# Altium PCB M2 Breakout.PcbDoc
Units mil, origin at the board's own origin, x right, y up, seen from the top; angles counter-clockwise.
Board outline 867.01 x 296.54 mil, 2 copper layers (Top Layer, Bottom Layer), stack 19.4 mil thick; 2 components, 49 nets, 130 pads, 33 vias.
Unrouted connection lines stored in the file: 1.
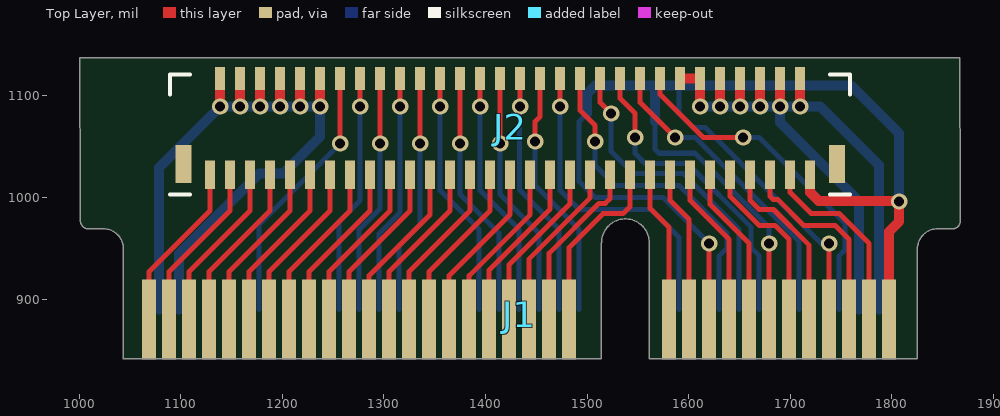
[diagram p0: Top Layer view]
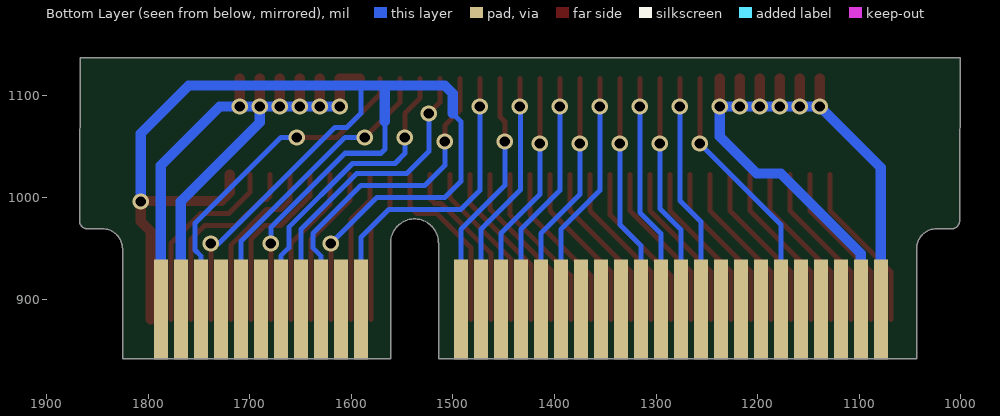
[diagram p1: Bottom Layer view, seen from below]

## Layer stack, top to bottom
Top Solder: solder mask 0.4, Solder Resist, Dk 3.5
Top Layer: signal copper 1.4
Dielectric 1: dielectric 16.6, FR-4, Dk 4.8
Bottom Layer: signal copper 1.4
Bottom Solder: solder mask 0.4, Solder Resist, Dk 3.5

## Board outline
1043.58,841.26 1043.58,949.53 ccw(c1023.9,949.53) 1023.9,969.21 1009.13,969.21 cw(c1009.13,977.09) 1001.26,977.09 1001.26,998.74 1000.39,1137.8 1866.53,1137.8 1867.4,998.74 1867.4,977.09 cw(c1859.53,977.09) 1859.53,969.21 1844.76,969.21 ccw(c1844.76,949.53) 1825.08,949.53 1825.08,841.26 1561.3,841.26 1561.3,955.43 1561.19,955.43 ccw(c1537.68,955.43) 1514.17,955.43 1514.06,955.43 1514.06,841.26

## Design rules (kind name [scope] priority, off if disabled: settings)
Clearance [All] p1: gap=5 ignorepadtopadclearanceinfootprint=FALSE except(0: Arc-Hole Track-Hole SMDPad-Hole THPad-Hole Via-Hole Fill-Hole Poly-Hole Region-Hole Text-Hole)
PolygonConnect [All] p1: connectstyle=Relief reliefconductorwidth=10 reliefentries=4 polygonreliefangle="90 Angle" airgapwidth=10
RoomDefinition "M2 Breakout" [InComponentClass('M2 Breakout')] p1: confinementstyle=ConfineIn formatcopy=TRUE lockcomponents=FALSE outline 0,0 7630,0 7630,5450 0,5450
RoutingVias [All] p1: holewidth=10 width=16 viastyle="Through Hole" minholewidth=8 minwidth=12 maxholewidth=16 maxwidth=20
SolderMaskExpansion [All] p1: expansion=4
Width [All] p1: maxlimit=10 minlimit=5 preferedwidth=6 minimp=50.000000 maximp=50.000000 favimp=50.000000
30 further rules are at their usual default settings.

## Components (designator, comment, footprint, x,y, rotation, side; value= is the part's Value field where it differs from the comment)
J1 "M.2 E-Key Shorty" "M.2 E-Key Shorty" 1433.07,840.55 r0 top
J2 "5020786162" 5020786162 1424.21,1022.44 r0 top

## Footprints (in the part's own frame and the unit in brackets; to place one, negate y for a bottom-side part, rotate by r counter-clockwise, add the part's x,y. Pads: shape width x height; smd on the part's side, far side on the other; paste and mask are expansions set on the pad)
5020786162 [mm] "Conn FPC Connector SKT 61 POS 0.25mm Solder RA SMD T/R"
  rect 0.25x0.72 smd: 1(7.5,0) 3(7,0) 5(6.5,0) 7(6,0) 9(5.5,0) 11(5,0) 13(4.5,0) 15(4,0) 17(3.5,0) 19(3,0) 21(2.5,0) 23(2,0) 25(1.5,0) 27(1,0) 29(0.5,0) 31(0,0) 33(-0.5,0) 35(-1,0) 37(-1.5,0) 39(-2,0) 41(-2.5,0) 43(-3,0) 45(-3.5,0) 47(-4,0) 49(-4.5,0) 51(-5,0) 53(-5.5,0) 55(-6,0) 57(-6.5,0) 59(-7,0) 61(-7.5,0)
  rect 0.25x0.57 smd: 2(7.25,2.405) 4(6.75,2.405) 6(6.25,2.405) 8(5.75,2.405) 10(5.25,2.405) 12(4.75,2.405) 14(4.25,2.405) 16(3.75,2.405) 18(3.25,2.405) 20(2.75,2.405) 22(2.25,2.405) 24(1.75,2.405) 26(1.25,2.405) 28(0.75,2.405) 30(0.25,2.405) 32(-0.25,2.405) 34(-0.75,2.405) 36(-1.25,2.405) 38(-1.75,2.405) 40(-2.25,2.405) 42(-2.75,2.405) 44(-3.25,2.405) 46(-3.75,2.405) 48(-4.25,2.405) 50(-4.75,2.405) 52(-5.25,2.405) 54(-5.75,2.405) 56(-6.25,2.405) 58(-6.75,2.405) 60(-7.25,2.405)
  rect 0.4x0.95 smd: 62(8.17,0.265) 63(-8.17,0.265)
  silkscreen extent -8.5,-0.5 8.5,2.5, body extent -8.5,-0.45 8.5,2.53, height 0.99
"M.2 E-Key Shorty" [mm]
  rect 0.35x2 smd paste-0.175: 1(9.25,1) 3(8.75,1) 5(8.25,1) 7(7.75,1) 9(7.25,1) 11(6.75,1) 13(6.25,1) 15(5.75,1) 17(5.25,1) 19(4.75,1) 21(4.25,1) 23(3.75,1) 33(1.25,1) 35(0.75,1) 37(0.25,1) 39(-0.25,1) 41(-0.75,1) 43(-1.25,1) 45(-1.75,1) 47(-2.25,1) 49(-2.75,1) 51(-3.25,1) 53(-3.75,1) 55(-4.25,1) 57(-4.75,1) 59(-5.25,1) 61(-5.75,1) 63(-6.25,1) 65(-6.75,1) 67(-7.25,1) 69(-7.75,1) 71(-8.25,1) 73(-8.75,1) 75(-9.25,1)
  rect 0.35x2.5 smd far side paste-0.175: 2(9,1.25) 4(8.5,1.25) 6(8,1.25) 8(7.5,1.25) 10(7,1.25) 12(6.5,1.25) 14(6,1.25) 16(5.5,1.25) 18(5,1.25) 20(4.5,1.25) 22(4,1.25) 32(1.5,1.25) 34(1,1.25) 36(0.5,1.25) 38(0,1.25) 40(-0.5,1.25) 42(-1,1.25) 44(-1.5,1.25) 46(-2,1.25) 48(-2.5,1.25) 50(-3,1.25) 52(-3.5,1.25) 54(-4,1.25) 56(-4.5,1.25) 58(-5,1.25) 60(-5.5,1.25) 62(-6,1.25) 64(-6.5,1.25) 66(-7,1.25) 68(-7.5,1.25) 70(-8,1.25) 72(-8.5,1.25) 74(-9,1.25)

## Part data
J2: "Conn FPC Connector SKT 61 POS 0.25mm Solder RA SMD T/R"

## Via types
v1: diameter 16, hole 10, Top Layer to Bottom Layer, 33 vias

## Nets (pads, with @x,y where several pads share a name; then routed paths per layer and width w, separated by ;. In a path a pad name is that pad's centre, name@x,y a point inside that pad or via, vN(x,y) a via of type N, cw(c..) or ccw(c..) an arc to the next point about the centre after c; other vN are vias at no path point)
3V3: J1.2 J1.4 J1.72 J1.74 J2.2 J2.4 J2.6 J2.8 J2.10 J2.12 J2.14 J2.50 J2.52 J2.54 J2.56 J2.58 J2.60 | length 1518.6
  Top Layer w10: v1(1138.78,1089.57) J2.60 ; v1(1158.46,1089.57) J2.58 ; v1(1178.15,1089.57) J2.56 ; v1(1197.83,1089.57) J2.54 ; v1(1217.52,1089.57) J2.52 ; v1(1237.2,1089.57) J2.50 ; J2.14 J2.12 v1(1611.22,1089.57) ; v1(1630.91,1089.57) J2.10 ; v1(1650.59,1089.57) J2.8 ; v1(1670.28,1089.57) J2.6 ; v1(1689.96,1089.57) J2.4 ; v1(1709.65,1089.57) J2.2
  Bottom Layer w10: J1.74 1078.74,1029.53 v1(1138.78,1089.57) v1(1158.46,1089.57) v1(1178.15,1089.57) v1(1197.83,1089.57) v1(1217.52,1089.57) v1(1237.2,1089.57) 1237.2,1060.04 1200.79,1023.62 1177.17,1023.62 1098.43,944.88 J1.72 ; v1(1611.22,1089.57) v1(1630.91,1089.57) v1(1650.59,1089.57) v1(1670.28,1089.57) v1(1689.96,1089.57) ; J1.4 1767.72,996.06 1689.96,1073.82 v1(1689.96,1089.57) ; J1.2 1787.4,1031.5 1729.33,1089.57 v1(1709.65,1089.57) v1(1689.96,1089.57)
6: J1.6 J2.16 | length 337.3
  Top Layer w5: J2.16 1571.85,1101.38 1614.17,1059.06 v1(1653.54,1059.06)
  Bottom Layer w5: v1(1653.54,1059.06) 1669.29,1059.06 1753.69,974.66 1753.69,948.3 1748.03,942.65 J1.6
10: J1.10 J2.18 | length 303.7
  Top Layer w5: J2.18 1552.17,1093.5 v1(1586.61,1059.06)
  Bottom Layer w5: v1(1586.61,1059.06) 1606.3,1059.06 1708.66,956.69 J1.10
14: J1.14 J2.20 | length 308.5
  Top Layer w5: J2.20 1532.48,1097.44 1547.24,1082.68 v1(1547.24,1059.06)
  Bottom Layer w5: v1(1547.24,1059.06) 1547.24,1043.31 1557,1033.56 1598.7,1033.56 1661.42,970.84 1661.42,950.52 1669.29,942.65 J1.14
16: J1.16 J2.22 | length 312.9
  Top Layer w5: J2.22 1512.8,1093.5 v1(1523.62,1082.68)
  Bottom Layer w5: v1(1523.62,1082.68) 1523.62,1045.28 1545.34,1023.56 1594.56,1023.56 1649.61,968.5 J1.16
18: J1.18 J2.24 | length 327.5
  Top Layer w5: J2.24 1493.11,1085.63 1507.87,1070.87 v1(1507.87,1055.12)
  Bottom Layer w5: v1(1507.87,1055.12) 1507.87,1031.5 1527.56,1011.81 1590.55,1011.81 1637.8,964.57 1637.8,950.52 1629.92,942.65 J1.18
22: J1.22 J2.26 | length 317.4
  Top Layer w5: v1(1473.43,1089.57) J2.26
  Bottom Layer w5: v1(1473.43,1089.57) 1473.43,1006.89 1492.13,988.19 1562.99,988.19 1590.55,960.63 J1.22
32: J1.32 J2.28 | length 247.3
  Top Layer w5: v1(1448.82,1055.12) 1448.82,1074.8 1453.74,1079.72 J2.28
  Bottom Layer w5: v1(1448.82,1055.12) 1448.82,1011.81 1492.13,968.5 J1.32
34: J1.34 J2.30 | length 243.9
  Top Layer w5: v1(1434.06,1089.57) J2.30
  Bottom Layer w5: v1(1434.06,1089.57) 1433.32,1088.83 1433.32,1007.63 1472.44,968.5 J1.34
36: J1.36 J2.32 | length 243.3
  Top Layer w5: v1(1414.37,1053.15) J2.32
  Bottom Layer w5: v1(1414.37,1053.15) 1414.37,1002.95 1452.76,964.57 J1.36
38: J1.38 J2.34 | length 243.3
  Top Layer w5: v1(1394.68,1089.57) J2.34
  Bottom Layer w5: v1(1394.68,1089.57) 1394.68,1006.89 1433.07,968.5 J1.38
40: J1.40 J2.36 | length 243.3
  Top Layer w5: v1(1375,1053.15) J2.36
  Bottom Layer w5: v1(1375,1053.15) 1375,1002.95 1413.39,964.57 J1.40
42: J1.42 J2.38 | length 243.3
  Top Layer w5: v1(1355.31,1089.57) J2.38
  Bottom Layer w5: v1(1355.31,1089.57) 1355.31,1006.89 1393.7,968.5 J1.42
50: J1.50 J2.40 | length 235.9
  Top Layer w5: v1(1335.63,1053.15) J2.40
  Bottom Layer w5: J1.50 1314.96,952.76 1335.63,973.43 v1(1335.63,1053.15)
52: J1.52 J2.42 | length 235.9
  Top Layer w5: v1(1315.94,1089.57) J2.42
  Bottom Layer w5: J1.52 1295.28,964.57 1315.94,985.24 v1(1315.94,1089.57)
54: J1.54 J2.44 | length 235.9
  Top Layer w5: v1(1296.26,1053.15) J2.44
  Bottom Layer w5: J1.54 1275.59,968.5 1296.26,989.17 v1(1296.26,1053.15)
56: J1.56 J2.46 | length 235.9
  Top Layer w5: v1(1276.57,1089.57) J2.46
  Bottom Layer w5: J1.56 1255.91,976.38 1276.57,997.05 v1(1276.57,1089.57)
64: J1.64 J2.48 | length 260.4
  Top Layer w5: v1(1256.89,1053.15) J2.48
  Bottom Layer w5: J1.64 1177.17,973.42 v1(1256.89,1053.15)
NetJ1_1: J1.1 J1.7 J1.13 J1.19 J2.1 | length 1544.3
  Top Layer w5: J1.19 v1(1620.08,954.72) ; J1.13 v1(1679.13,954.72) ; J1.7 v1(1738.19,954.72)
  Top Layer w10: J2.1 1719.49,1004.92 1727.66,996.75 1806.4,996.75 v1(1807.09,996.06) 1807.09,976.38 1797.24,966.54 J1.1
  Bottom Layer w5: 1500,1082.68 1492.13,1074.8 1492.13,1015.75 1507.87,1000 1574.8,1000 v1(1620.08,954.72) ; 1566.93,1074.8 1566.93,1047.24 1570.62,1043.56 1606.05,1043.56 1679.13,970.47 v1(1679.13,954.72) ; 1590.55,1110.24 1590.55,1082.68 1604.17,1069.06 1615.98,1069.06 1730.31,954.72 v1(1738.19,954.72)
  Bottom Layer w10: 1500,1082.68 1500,1102.36 1507.87,1110.24 1566.93,1110.24 ; 1566.93,1074.8 1566.93,1110.24 ; v1(1807.09,996.06) 1807.09,1062.99 1759.84,1110.24 1590.55,1110.24 1566.93,1110.24
NetJ1_3: J1.3 J2.3 | length 190.9
  Top Layer w5: J2.3 1699.8,1004.92 1720.47,984.25 1748.03,984.25 1777.56,954.72 J1.3
NetJ1_5: J1.5 J2.5 | length 195.5
  Top Layer w5: J2.5 1680.12,1000.98 1682.91,998.19 1687.58,998.19 1713.32,972.44 1744.09,972.44 1757.87,958.66 J1.5
NetJ1_9: J1.9 J2.7 | length 174.9
  Top Layer w5: J2.7 1660.43,997.05 1669.29,988.19 1683.43,988.19 1718.5,953.12 J1.9
NetJ1_11: J1.11 J2.9 | length 175.8
  Top Layer w5: J2.9 1640.75,1000.98 1669.29,972.44 1685.04,972.44 1698.82,958.66 J1.11
NetJ1_15: J1.15 J2.11 | length 158.4
  Top Layer w5: J2.11 1621.06,993.11 1659.45,954.72 J1.15
NetJ1_17: J1.17 J2.13 | length 158.4
  Top Layer w5: J2.13 1601.38,997.05 1639.76,958.66 J1.17
NetJ1_21: J1.21 J2.15 | length 150.3
  Top Layer w5: J2.15 1581.69,997.05 1600.39,978.35 J1.21
NetJ1_23: J1.23 J2.17 | length 150.3
  Top Layer w5: J2.17 1562.01,989.17 1580.71,970.47 J1.23
NetJ1_33: J1.33 J2.19 | length 178.9
  Top Layer w5: J1.33 1482.28,950.79 1515.75,984.25 1535.43,984.25 1542.32,991.14 J2.19
NetJ1_35: J1.35 J2.21 | length 171.1
  Top Layer w5: J1.35 1462.6,945.24 1511.61,994.25 1517.87,994.25 1522.64,999.02 J2.21
NetJ1_37: J1.37 J2.23 | length 167.4
  Top Layer w5: J1.37 1442.91,939.7 1502.95,999.74 J2.23
NetJ1_39: J1.39 J2.25 | length 167.4
  Top Layer w5: J1.39 1423.23,934.16 1483.27,994.2 J2.25
NetJ1_41: J1.41 J2.27 | length 167.4
  Top Layer w5: J1.41 1403.54,928.62 1463.58,988.65 J2.27
NetJ1_43: J1.43 J2.29 | length 167.4
  Top Layer w5: J1.43 1383.86,923.07 1443.9,983.11 J2.29
NetJ1_45: J1.45 J2.31 | length 167.4
  Top Layer w5: J1.45 1364.17,923.23 1424.21,983.27 J2.31
NetJ1_47: J1.47 J2.33 | length 167.4
  Top Layer w5: J1.47 1344.49,927.17 1404.53,987.2 J2.33
NetJ1_49: J1.49 J2.35 | length 167.4
  Top Layer w5: J1.49 1324.8,927.17 1384.84,987.2 J2.35
NetJ1_51: J1.51 J2.37 | length 167.4
  Top Layer w5: J1.51 1305.12,927.17 1365.16,987.2 J2.37
NetJ1_53: J1.53 J2.39 | length 167.4
  Top Layer w5: J1.53 1285.43,923.23 1345.47,983.27 J2.39
NetJ1_55: J1.55 J2.41 | length 167.4
  Top Layer w5: J1.55 1265.75,927.17 1325.79,987.2 J2.41
NetJ1_57: J1.57 J2.43 | length 167.4
  Top Layer w5: J1.57 1246.06,927.17 1306.1,987.2 J2.43
NetJ1_59: J1.59 J2.45 | length 167.4
  Top Layer w5: J1.59 1226.38,927.17 1286.42,987.2 J2.45
NetJ1_61: J1.61 J2.47 | length 167.4
  Top Layer w5: J1.61 1206.69,927.17 1266.73,987.2 J2.47
NetJ1_63: J1.63 J2.49 | length 167.4
  Top Layer w5: J1.63 1187.01,927.17 1247.05,987.2 J2.49
NetJ1_65: J1.65 J2.51 | length 167.4
  Top Layer w5: J1.65 1167.32,927.17 1227.36,987.2 J2.51
NetJ1_67: J1.67 J2.53 | length 167.4
  Top Layer w5: J1.67 1147.64,927.17 1207.68,987.2 J2.53
NetJ1_69: J1.69 J2.55 | length 167.4
  Top Layer w5: J1.69 1127.95,927.17 1187.99,987.2 J2.55
NetJ1_71: J1.71 J2.57 | length 167.4
  Top Layer w5: J1.71 1108.27,927.17 1168.31,987.2 J2.57
NetJ1_73: J1.73 J2.59 | length 167.4
  Top Layer w5: J1.73 1088.58,927.17 1148.62,987.2 J2.59
NetJ1_75: J1.75 J2.61 | length 167.4
  Top Layer w5: J1.75 1068.9,927.17 1128.94,987.2 J2.61
pads on no net: J1.8 J1.12 J1.20 J1.44 J1.46 J1.48 J1.58 J1.60 J1.62 J1.66 J1.68 J1.70 J2.62 J2.63

## Silkscreen, mask and mechanical layers (free items; w line width, h text height)
Mechanical 10:
  lines w3.94: 1514.06,955.43 1514.06,841.26 ; 1514.17,955.43 cw(c1537.68,955.43) 1561.19,955.43 ; 1561.3,955.43 1561.3,841.26 1825.08,841.26 1825.08,949.53 cw(c1844.76,949.53) 1844.76,969.21 1859.53,969.21 ccw(c1859.53,977.09) 1867.4,977.09 1867.4,998.74 ; 1867.37,998.77 ccw(c1867.4,998.77) 1867.4,998.74 ; 1043.58,841.26 ccw(c1043.58,841.26) 1043.58,841.26 ; 1043.58,841.26 1514.06,841.26 ; 1043.58,841.26 1043.58,949.53 ccw(c1023.9,949.53) 1023.9,969.21 1009.13,969.21 cw(c1009.13,977.09) 1001.26,977.09 1001.26,984.25 1001.26,998.74 1000.39,1137.8 1866.53,1137.8 1867.4,998.74 ; 1514.06,841.26 ccw(c1514.06,841.26) 1514.06,841.26